# Altium PCB PCB1.PcbDoc
Units mil, origin at the board's own origin, x right, y up, seen from the top; angles counter-clockwise.
Board outline 1800 x 1750 mil, 2 copper layers (Top Layer, Bottom Layer); 15 components, 11 nets, 41 pads, 2 vias.
Unrouted connection lines stored in the file: 1.
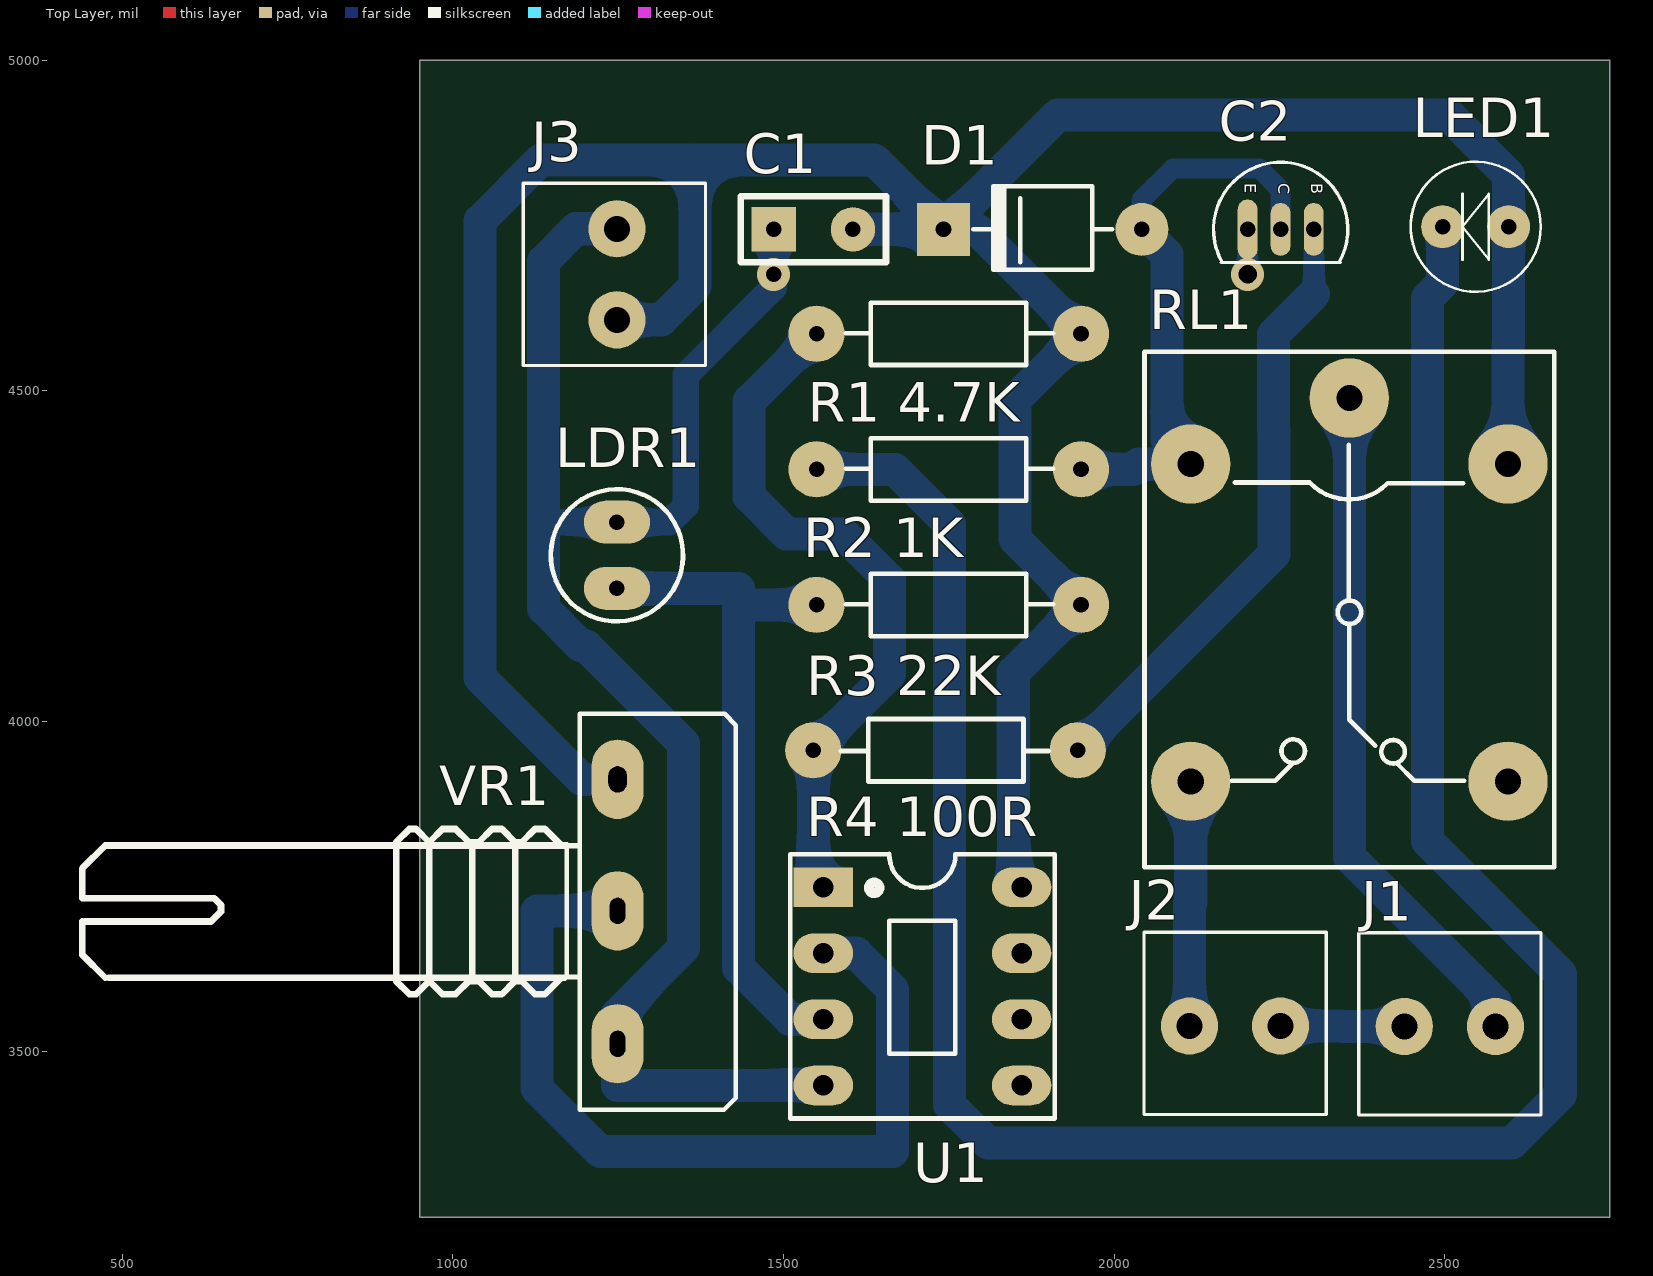
[diagram p0: Top Layer view]
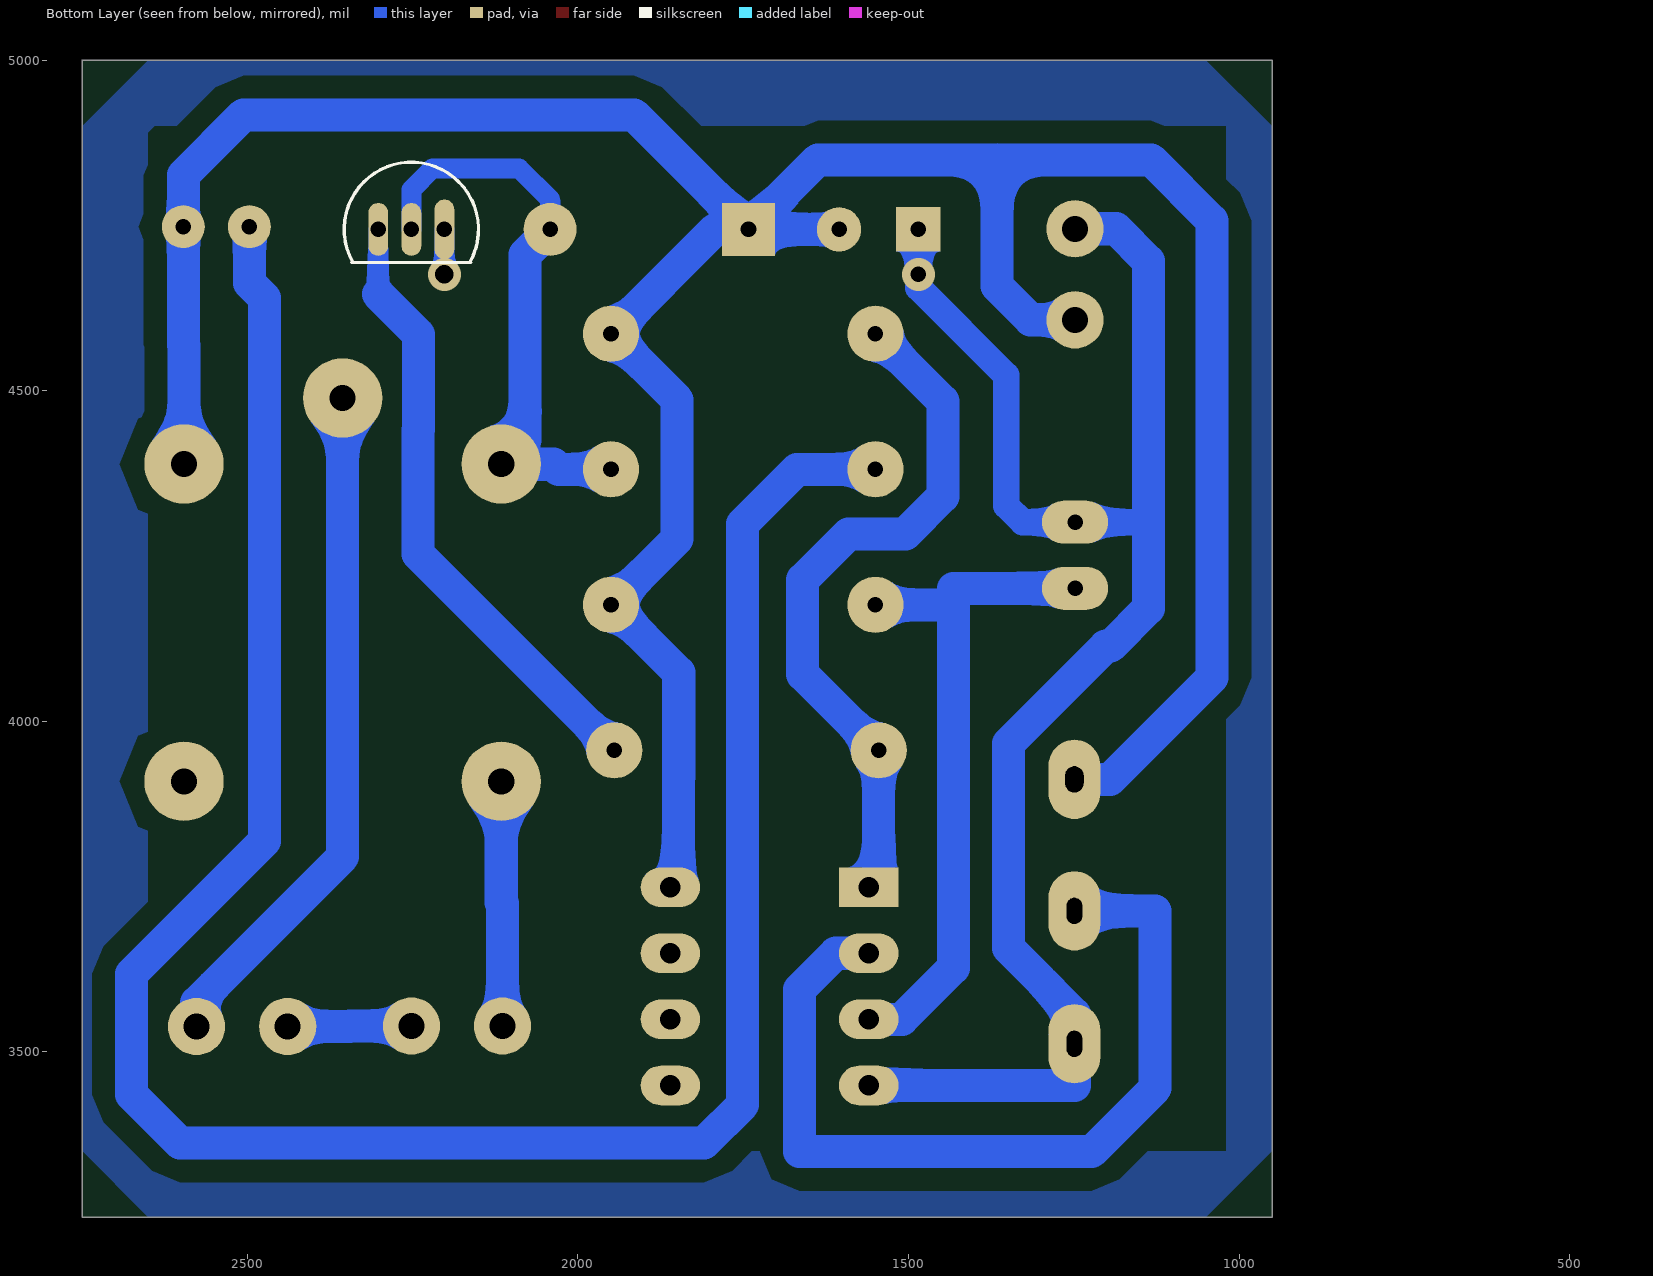
[diagram p1: Bottom Layer view, seen from below]
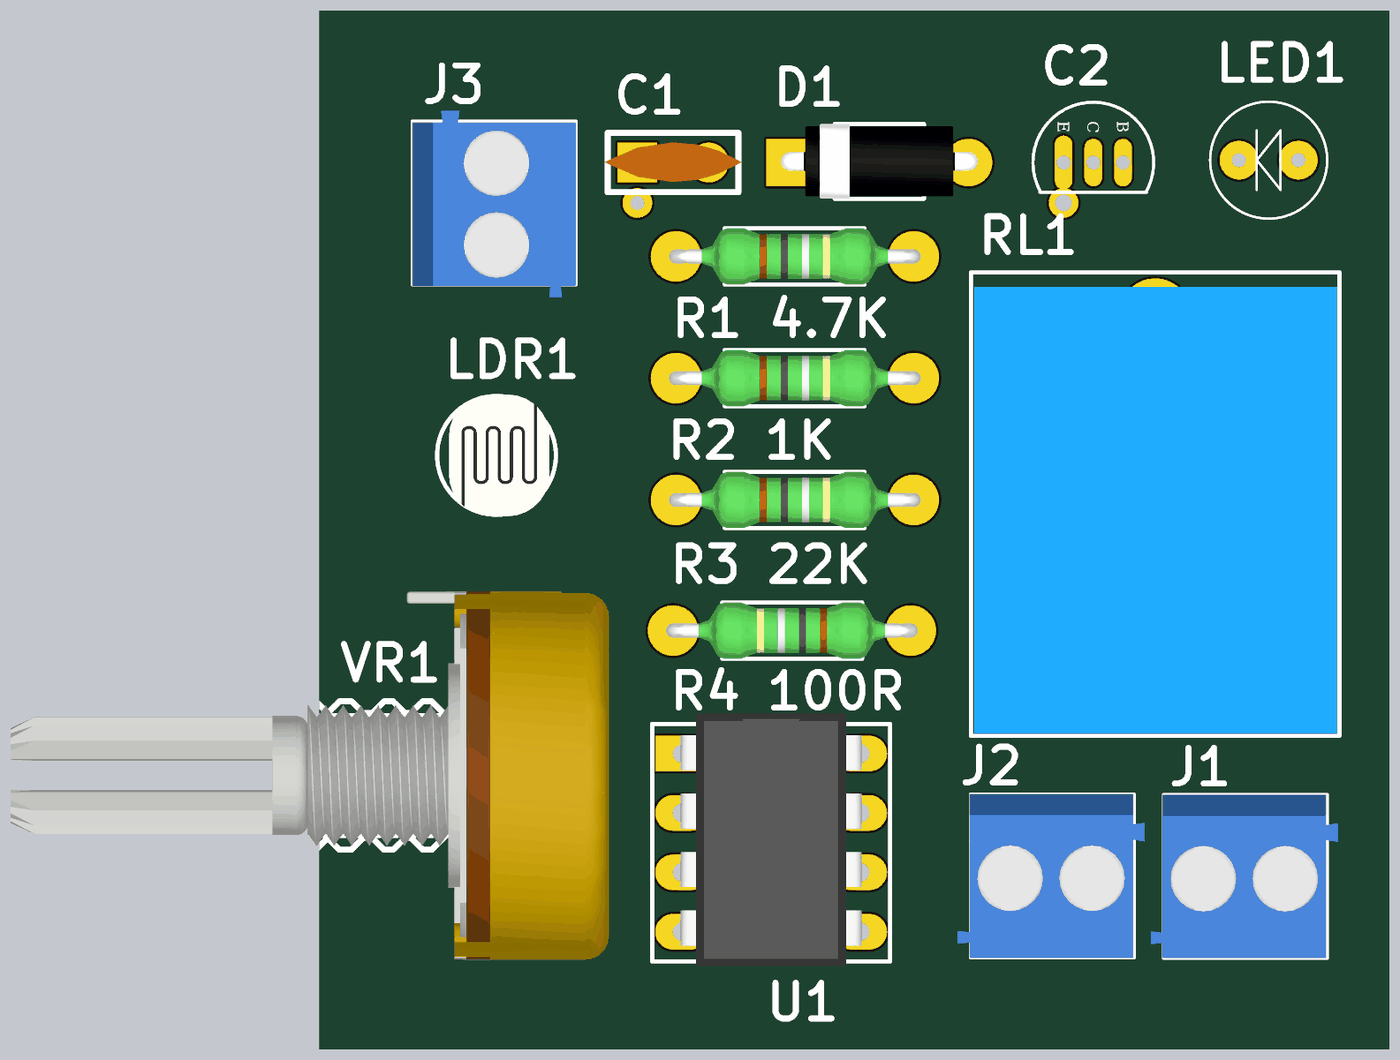
[diagram p2: 3D render of the assembled board from above, using the file's embedded part models]

## Layer stack, top to bottom
Top Solder: solder mask 0.4, Solder Resist, Dk 3.5
Top Layer: signal copper 1.4
Dielectric 1: dielectric 12.6, FR-4, Dk 4.8
Bottom Layer: signal copper 1.4
Bottom Solder: solder mask 0.4, Solder Resist, Dk 3.5

## Board outline
950,3250 2750,3250 2750,5000 950,5000

## Design rules (kind name [scope] priority, off if disabled: settings)
Clearance [All] p1: gap=30
PolygonConnect [All] p1: connectstyle=Relief reliefconductorwidth=10 reliefentries=4 polygonreliefangle="90 Angle" airgapwidth=10
RoutingLayers [All] p1: top layer_v5=FALSE bottom layer_v5=TRUE
RoutingVias [All] p1: holewidth=28 width=80 viastyle="Through Hole" minholewidth=28 minwidth=80 maxholewidth=28 maxwidth=80
SolderMaskExpansion [All] p1: expansion=4
Width [All] p1: maxlimit=50 minlimit=20 preferedwidth=50
29 further rules are at their usual default settings.

## Components (designator, comment, footprint, x,y, rotation, side; value= is the part's Value field where it differs from the comment)
C1 "Cap Non-pol" "Cap Non-Pol 3mm" 1545,4744 r0 top
C2 "C1815" TO92-ECB 2252,4744 r270 top
D1 "Diode" DIO-1A-SMALL 2092,4744 r0 top
J1 "KF2" KF2-3.5 2508,3538.23 r180 top
J2 "KF2" KF2-3.5 2183,3539 r180 top
J3 "KF2" KF2-3.5 1248,4676 r270 top
LDR1 "LDR" CDS 1248,4301 r270 top
LED1 "LED" LED-5MM-RED 2597,4748 r180 top
"R1 4.7K" "4,7k" RES-1/4W 1735,4591 r180 top (schematic designator R1)
"R2 1K" "1K" RES-1/4W 1735,4386 r180 top (schematic designator R2)
"R3 22K" "22k" RES-1/4W 1735,4181 r180 top (schematic designator R3)
"R4 100R" "100R" RES-1/4W 1760,3951 r0 top (schematic designator R4)
RL1 "Relay 5V" "RELAY 5" 2356,4164 r270 top
U1 "LM393" DIP8 1710,3604 r270 top
VR1 "20K" VR-S1 1249,3712 r270 top

## Footprints (in the part's own frame and the unit in brackets; to place one, negate y for a bottom-side part, rotate by r counter-clockwise, add the part's x,y. Pads: shape width x height; smd on the part's side, far side on the other; paste and mask are expansions set on the pad)
"Cap Non-Pol 3mm" [mil] "Capacitor, Radial; Body 5.6 x 2.5 mm (L x W typ); Pin Spacing 3 mm (typ); Solder Pad 35mil"
  rect 67x67 hole 23.62: 1(-60,0)
  round 67 hole 23.62: 2(60,0)
  silkscreen extent -110,-50 110,50, body extent -115,-33 115,34, height 245
CDS [mil] "QUANG TRO"
  oval 65x100 hole 23.62: 1(0,0) 2(100,0)
  silkscreen extent -50,-100 150,100, body extent -53,-80 153,89, height 138
DIO-1A-SMALL [mil] "Diode 1A, W 100mil, L 350mil"
  round 80 hole 23.62: 1(-50,0)
  rect 80x80 hole 23.62: 2(-350,0)
  silkscreen extent -305,-61 -95,65, body extent -366,-61 -34,65, height 122
DIP8 [mil] "DIP, 8-Leads, Row Spacing 7.62mm, Pitch 2.54mm, Body 9.91x6.73mm"
  rect 60x90 hole 31: 1(-145,-150)
  oval 60x90 hole 31: 2(-45,-150) 3(55,-150) 4(155,-150) 5(155,150) 6(55,150) 7(-45,150) 8(-145,150)
  silkscreen extent -195,-200 205,200, body extent -213,-153 213,153, height 177
KF2-3.5 [mm] "3,50mm - modular - blue - Horizontal wire entry - Pressure clamp - 8,4mm height - 02p"
  round 2.2 hole 1: 1(-1.75,0) 2(1.75,0)
  silkscreen extent -3.5,-3.6 3.5,3.4, body extent -3.95,-3.6 4.05,3.4, height 8.41
LED-5MM-RED [mil]
  round 65 hole 23.62: 1(0,0) 2(100,0)
  silkscreen extent -48,-98 148,98, body extent -54,-105 155,105, height 370
"RELAY 5" [mil] "Reley DPDT, 8 pin, 1A, W400mil, L800mil,H 300mil"
  round 120 hole 39.37: 1(-325,0) 2(255,240) 3(255,-240) 4(-225,-240) 5(-225,240)
  silkscreen extent -395,-310 385,310, body extent -371,-304 381,306, height 602
RES-1/4W [mil]
  round 85 hole 23.62: 1(-215,5) 2(185,5)
  silkscreen extent -173,-42 141,52, body extent -227,-42 197,52, height 95
TO92-ECB [mil] "C1815"
  oval 80x30 hole 23.62 unplated: 1(0,50) 3(0,0)
  oval 90.55x30 hole 23.62 unplated: 2(0,-50)
  silkscreen extent -101,-102 50,102, body extent -90,-90 48,88, height 315
VR-S1 [mm]
  oval 3.048x2 hole 0.7 slot 1 at 0 deg: 1(-5.08,0)
  oval 3.048x2 hole 0.6 slot 1 at 0 deg: 2(-0.025,0) 3(5.08,0)
  silkscreen extent -7.59,-20.57 7.62,4.55, body extent -7.87,-20.78 7.87,4.78, height 21.32

## Part data
C1: "Non-polarized Capacitor"
C2: "Q2SC1815"
D1: "Default Diode"
LDR1: "Quang Tro"
LED1: "LED Single colour Green and Red"
"R1 4.7K" "R2 1K" "R3 22K" "R4 100R": library part Res, "Res"
RL1: library part "Relay 5", "Relay SPDT,10A - 12VDC 5 Pin"
U1: "IC DUAL COMPARATOR"
VR1: library part VR-S, "Var Resistor"

## Via types
v1: diameter 50, hole 28, Top Layer to Bottom Layer, 1 vias
v2: diameter 50, hole 23.62, Top Layer to Bottom Layer, 1 vias

## Nets (pads, with @x,y where several pads share a name; then routed paths per layer and width w, separated by ;. In a path a pad name is that pad's centre, name@x,y a point inside that pad or via, vN(x,y) a via of type N, cw(c..) or ccw(c..) an arc to the next point about the centre after c; other vN are vias at no path point)
GND: C1.1 C2.2 J3.1 LDR1.1 U1.4 VR1.3 | length 2636.2
  Bottom Layer w30: v2@1485,4656 C1.1 ; v1(2202,4676) C2.2
  Bottom Layer w40: 1158,4301 LDR1.1 1327,4301 1352,4326 1352,4523 v2@1485,4656 ; v2(1485,4676) C1.1
  Bottom Layer w50: J3.1 1185.9,4744.9 1137,4696 1137,4170.76 1194.26,4113.5 1201.59,4113.5 1349,3966.09 1349,3657 1249,3557 VR1.3 1249,3449 U1.4
NetC2_1: "R4 100R.2" C2.1 | length 936.7
  Bottom Layer w30: 2302,4646 C2.1
  Bottom Layer w50: 1945,3956 2242,4253 2242,4440.37 2241,4441.37 2241,4585 2242,4586 2302,4646
NetC2_3: "R2 1K.1" C2.3 D1.1 RL1.4 | length 902.7
  Bottom Layer w30: D1.1 2042,4789 2089,4836 2220,4836 2252,4804 C2.3
  Bottom Layer w50: 1950,4381 2029,4381 2037,4389 RL1.4 2080,4425 2080,4706 D1.1
NetJ1_1: J1.1 RL1.1 | length 1042.3
  Bottom Layer w50: RL1.1 2356,3795 2576.9,3574.1 J1.1
NetJ1_2: J1.2 J2.1 | length 187.5
  Bottom Layer w30: 2345,3539 2345.77,3538.23
  Bottom Layer w50: J2.1 2345,3539 ; 2345.77,3538.23 J1.2
NetJ2_2: J2.2 RL1.3 | length 370.8
  Bottom Layer w30: 2114.1,3724 2116,3725.9
  Bottom Layer w50: J2.2 2114.1,3724 ; 2116,3725.9 RL1.3
NetLDR1_2: "R3 22K.2" LDR1.2 U1.3 | length 1050.7
  Bottom Layer w30: 1428,4201 1453,4176
  Bottom Layer w50: LDR1.2 1432,4201 1432,3627 1510,3549 U1.3 ; 1453,4176 1550,4176
NetLED1_2: "R2 1K.2" LED1.2 | length 3497.9
  Bottom Layer w50: 1550,4381 1668.45,4381 1751,4298.45 1751,3420 1809,3362 2602,3362 2675.21,3435.21 2675.21,3617.79 2474,3819 2474,4640 2497,4663 LED1.2
NetR1_2: "R1 4.7K.2" "R4 100R.1" U1.1 | length 1080.1
  Bottom Layer w30: U1.1@1545,3749 U1.1
  Bottom Layer w50: U1.1@1545,3749 1545,3956 1660,4071 1660,4214 1590.5,4283.5 1504.5,4283.5 1448,4340 1448,4484 1550,4586
NetU1_2: U1.2 VR1.2 | length 1340.5
  Bottom Layer w50: VR1.2 1127,3713 1127,3445 1223,3349 1665,3349 1665,3594 1610,3649 U1.2
VCC: "R1 4.7K.1" "R3 22K.1" C1.2 D1.2 J3.2 LED1.1 RL1.5 U1.8 VR1.1 | length 4862.2
  Bottom Layer w30: U1.8@1848,3749 U1.8 ; 2596,4568 2597,4569
  Bottom Layer w50: J3.2 1315.1,4607.1 1366,4658 1366,4849 ; VR1.1 1195,3912 1041,4066 1041,4757 1133,4849 1366,4849 ; C1.2 D1.2 ; U1.8@1848,3749 1848,3915.11 1847.5,3915.61 1847.5,4073.5 1950,4176 1850,4276 1850,4486 1950,4586 1792,4744 D1.2 ; RL1.5 2596,4568 ; 2597,4569 LED1.1 2597,4826 2506,4917 1915,4917 D1.2 ; 1366,4849 1637,4849 D1.2
pads on no net: RL1.2 U1.5 U1.6 U1.7

## Polygon pours and split planes (outlines as drawn)
GND on Bottom Layer "Mechanical 1-No Net" (solid, pour order 6): 950,4900 1050,5000 2650,5000 2750,4900 2750,3400 2750,3350 2650,3250 1050,3250 950,3350 950,4900

## Other copper
Bottom Layer:
  pour cut-out: 1020,4900 2640,4900 2650,4890 2650,3350 1020,3350

## Text inside footprints (layer, text, board x,y; h text height)
C2: Top Overlay "E" at 2192,4814 h30 r270; Top Overlay "B" at 2292,4814 h30 r270; Top Overlay "C" at 2242,4814 h30 r270